# Altium PCB KCD_BRUSH_MOTOR_LH.PcbDoc
Units mil, origin at the board's own origin, x right, y up, seen from the top; angles counter-clockwise.
Board outline 637.62 x 582.31 mil, 2 copper layers (Top Layer, Bottom Layer); 8 components, 7 nets, 27 pads, 6 vias.
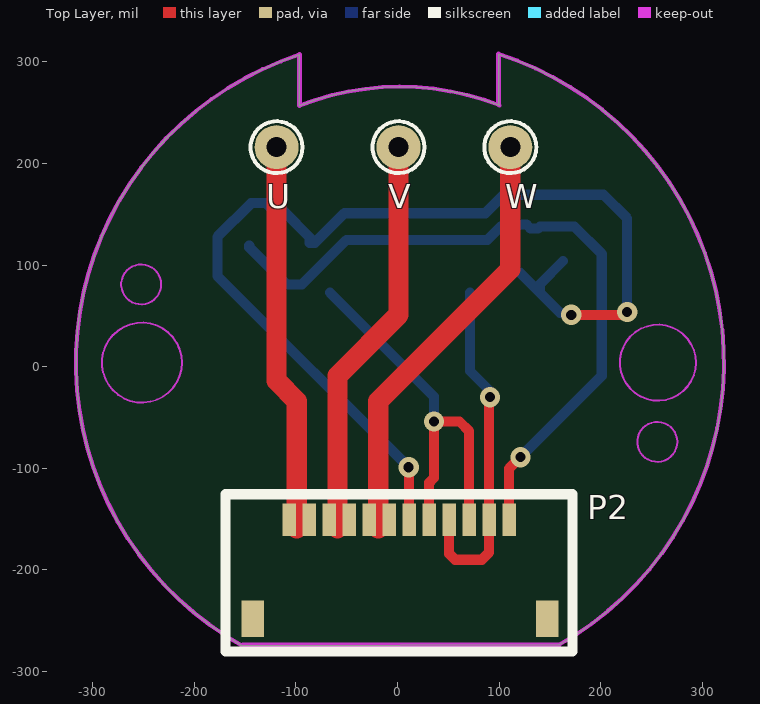
[diagram p0: Top Layer view]
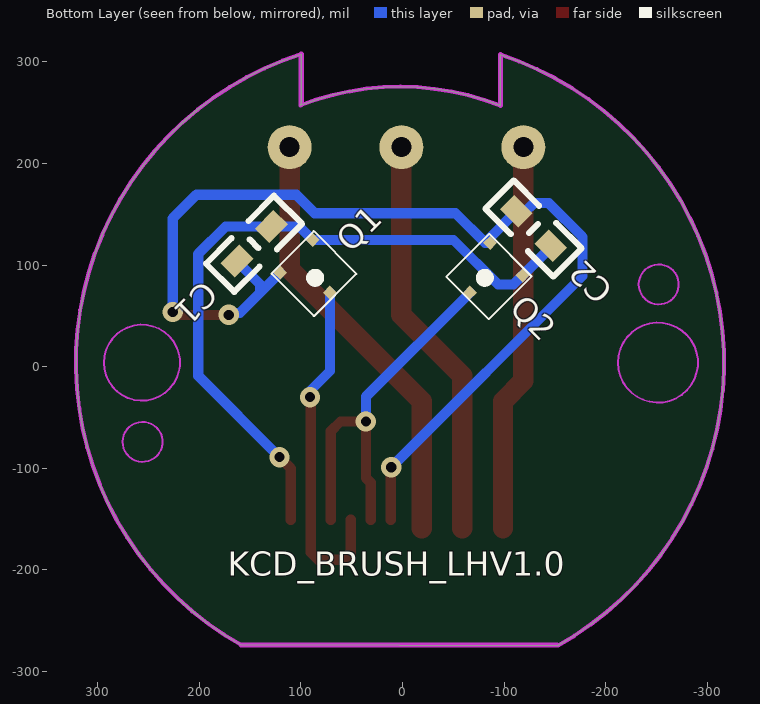
[diagram p1: Bottom Layer view, seen from below]

## Layer stack, top to bottom
Top Solder: solder mask 0.4, Solder Resist, Dk 3.5
Top Layer: signal copper 1.4
Dielectric 1: dielectric 12.6, FR-4, Dk 4.8
Bottom Layer: signal copper 1.4
Bottom Solder: solder mask 0.4, Solder Resist, Dk 3.5

## Board outline
-152.79,-274.59 cw(c2.42,3.99) -96.49,307.16 -96.49,257 cw(c2.41,4) 100.53,257.3 99.59,258.24 99.59,307.72 cw(c2.42,3.99) 158.9,-273.88

## Design rules (kind name [scope] priority, off if disabled: settings)
Clearance [All] p1: gap=8 ignorepadtopadclearanceinfootprint=FALSE
PolygonConnect [All] p1: connectstyle=Relief reliefconductorwidth=10 reliefentries=4 polygonreliefangle="90 Angle" airgapwidth=10
RoutingVias [All] p1: holewidth=10 width=20 viastyle="Through Hole" minholewidth=5 minwidth=10 maxholewidth=30 maxwidth=50
SolderMaskExpansion [All] p1: expansion=4 istentingtop=FALSE
Width [All] p1: maxlimit=30 minlimit=8 preferedwidth=10
30 further rules are at their usual default settings.

## Components (designator, comment, footprint, x,y, rotation, side; value= is the part's Value field where it differs from the comment)
C1 "100nF/50V" "C 0402_M" 146,121 r315 bottom (schematic designator C6)
C2 "100nF/50V" "C 0402_M" -129,136 r45 bottom (schematic designator C6)
P2 "Header 12" SMD-12 109.92,-150.61 r180 top
Q1 "MT9101DT" DFN1616 85.93,87.5 r315 bottom locked
Q2 "MT9101DT" DFN1616 -81.1,87.5 r45 bottom locked
U "HD" HD -119,216 r90 top
V "HD" HD 1,216 r90 top
W "HD" HD 111,216 r90 top

## Footprints (in the part's own frame and the unit in brackets; to place one, negate y for a bottom-side part, rotate by r counter-clockwise, add the part's x,y. Pads: shape width x height; smd on the part's side, far side on the other; paste and mask are expansions set on the pad)
"C 0402_M" [mil] "无极性贴片电容"
  rect 26x20 smd: 1(-24,0) 2(24,0)
  silkscreen extent -47,-20 47,20, body extent -20,-10 20,10, height 21
DFN1616 [mm]
  rect 0.25x0.25 smd: 1(-0.625,-0.711) 2(0.525,-0.711) 3(0,0.525)
  silkscreen extent -0.8,-0.85 0.7,0.66
HD [mm]
  round 1.1 hole 0.5: 1(0,0)
  silkscreen extent -0.65,-0.65 0.65,0.65
SMD-12 [mil]
  rect 22x36 smd: 0(252.38,97.5) 0/2(-37.62,97.5)
  rect 13x32 smd: 1(216.53,0) 2(196.85,0) 3(177.16,0) 4(157.48,0) 5(137.8,0) 6(118.11,0) 7(98.43,0) 8(78.74,0) 9(59.05,0) 10(39.37,0) 11(19.68,0) 12(0,0)
  silkscreen extent -62,-25 279,130

## Part data
C1 C2: library part C, "Capacitor"
P2: "Header, 12-Pin"

## Via types
v1: diameter 20, hole 10, Top Layer to Bottom Layer, tented both sides, 6 vias

## Nets (pads, with @x,y where several pads share a name; then routed paths per layer and width w, separated by ;. In a path a pad name is that pad's centre, name@x,y a point inside that pad or via, vN(x,y) a via of type N, cw(c..) or ccw(c..) an arc to the next point about the centre after c; other vN are vias at no path point)
3V3: C1.1 C2.1 P2.12 Q1.1 Q2.1 | length 701.2
  Top Layer w10: P2.12 109.92,-100.08 v1(121,-89)
  Bottom Layer w10: C2.1 -145.97,117.58 Q2.1 -109.4,81 -94,81 -50.3,124.7 Q1.1 101.6,137.97 117.72,137.97 119.84,140.09 126.91,140.09 C1.1 131.15,135.85 138.22,135.85 140.34,137.97 174.03,137.97 201,111 201,-9 v1(121,-89)
GND: C1.2 C2.2 P2.7 Q1.2 Q2.2 | length 1079.8
  Top Layer w10: v1(11,-99) 11.49,-99.49 P2.7 ; v1(171,51) 220.43,51 223.29,53.86 v1(226,53.86)
  Bottom Layer w10: v1(11,-99) -177.23,89.23 -177.23,127.77 -144,161 -129.15,161 -120.11,151.96 -113.04,151.96 C2.2 -86.28,127.23 Q2.2 -81.37,121.92 -52.28,151 86.34,151 104.58,169.23 202.77,169.23 226,146 v1(226,53.86) ; Q1.2 140.23,72.8 ; C1.2 140.23,81.29 140.23,72.8 ; v1(171,51) 169.09,52.91 160.12,52.91 140.23,72.8
LH_0: P2.9 P2.11 Q1.3 | length 342.5
  Top Layer w10: P2.9 50.86,-184.14 56.72,-190 83,-190 90.23,-182.77 P2.11 90.23,-30.77 v1(91,-30)
  Bottom Layer w10: Q1.3 71.32,-4.32 91,-24 v1(91,-30)
LH_1: P2.8 P2.10 Q2.3 | length 393.5
  Top Layer w10: P2.8 31.18,-114.18 36,-109.36 v1(36,-54) 61,-54 70.55,-63.55 P2.10
  Bottom Layer w10: Q2.3 36,-29.6 v1(36,-54)
U: P2.1 P2.2 U.1 | length 383.3
  Top Layer w20: U.1 -119,-14 -99,-34 -99,-159
V: P2.3 P2.4 V.1 | length 399.9
  Top Layer w20: -59,-159 -59,-9 1,51 V.1
W: P2.5 P2.6 W.1 | length 428.8
  Top Layer w20: -19,-159 -19,-34 111,96 W.1
pads on no net: P2.0 P2.0/2

## Keep-outs
Keep-Out Layer:
  circle w1.97: c-251.52,3.99 r39.37
  circle w1.97: c256.35,3.99 r37.4
  circle w1.97: c255.73,-74.01 r19.68
  circle w1.97: c-252.27,80.99 r19.68
  lines w3.94: -152.79,-274.59 cw(c2.42,3.99) -96.49,307.16 ; -96.5,256.99 cw(c2.42,3.99) 100.53,257.3 ; 99.59,307.72 cw(c2.42,3.99) 158.9,-273.88
  lines w5: -152.08,-273.88 158.9,-273.88 ; -96.49,257 -96.49,307.16 ; 99.59,258.24 99.59,307.72

## Silkscreen, mask and mechanical layers (free items; w line width, h text height)
Bottom Overlay:
  text "KCD_BRUSH_LHV1.0" at 172,-206 h23.62